# Altium PCB 12.4呼叫器.PcbDoc (part 3 of 5)
Units mm, origin at the board's own origin, x right, y up, seen from the top; angles counter-clockwise.
Board outline 60 x 92 mm, 2 copper layers (Top Layer, Bottom Layer); 66 components, 44 nets, 270 pads, 58 vias.
Unrouted connection lines stored in the file: 4.
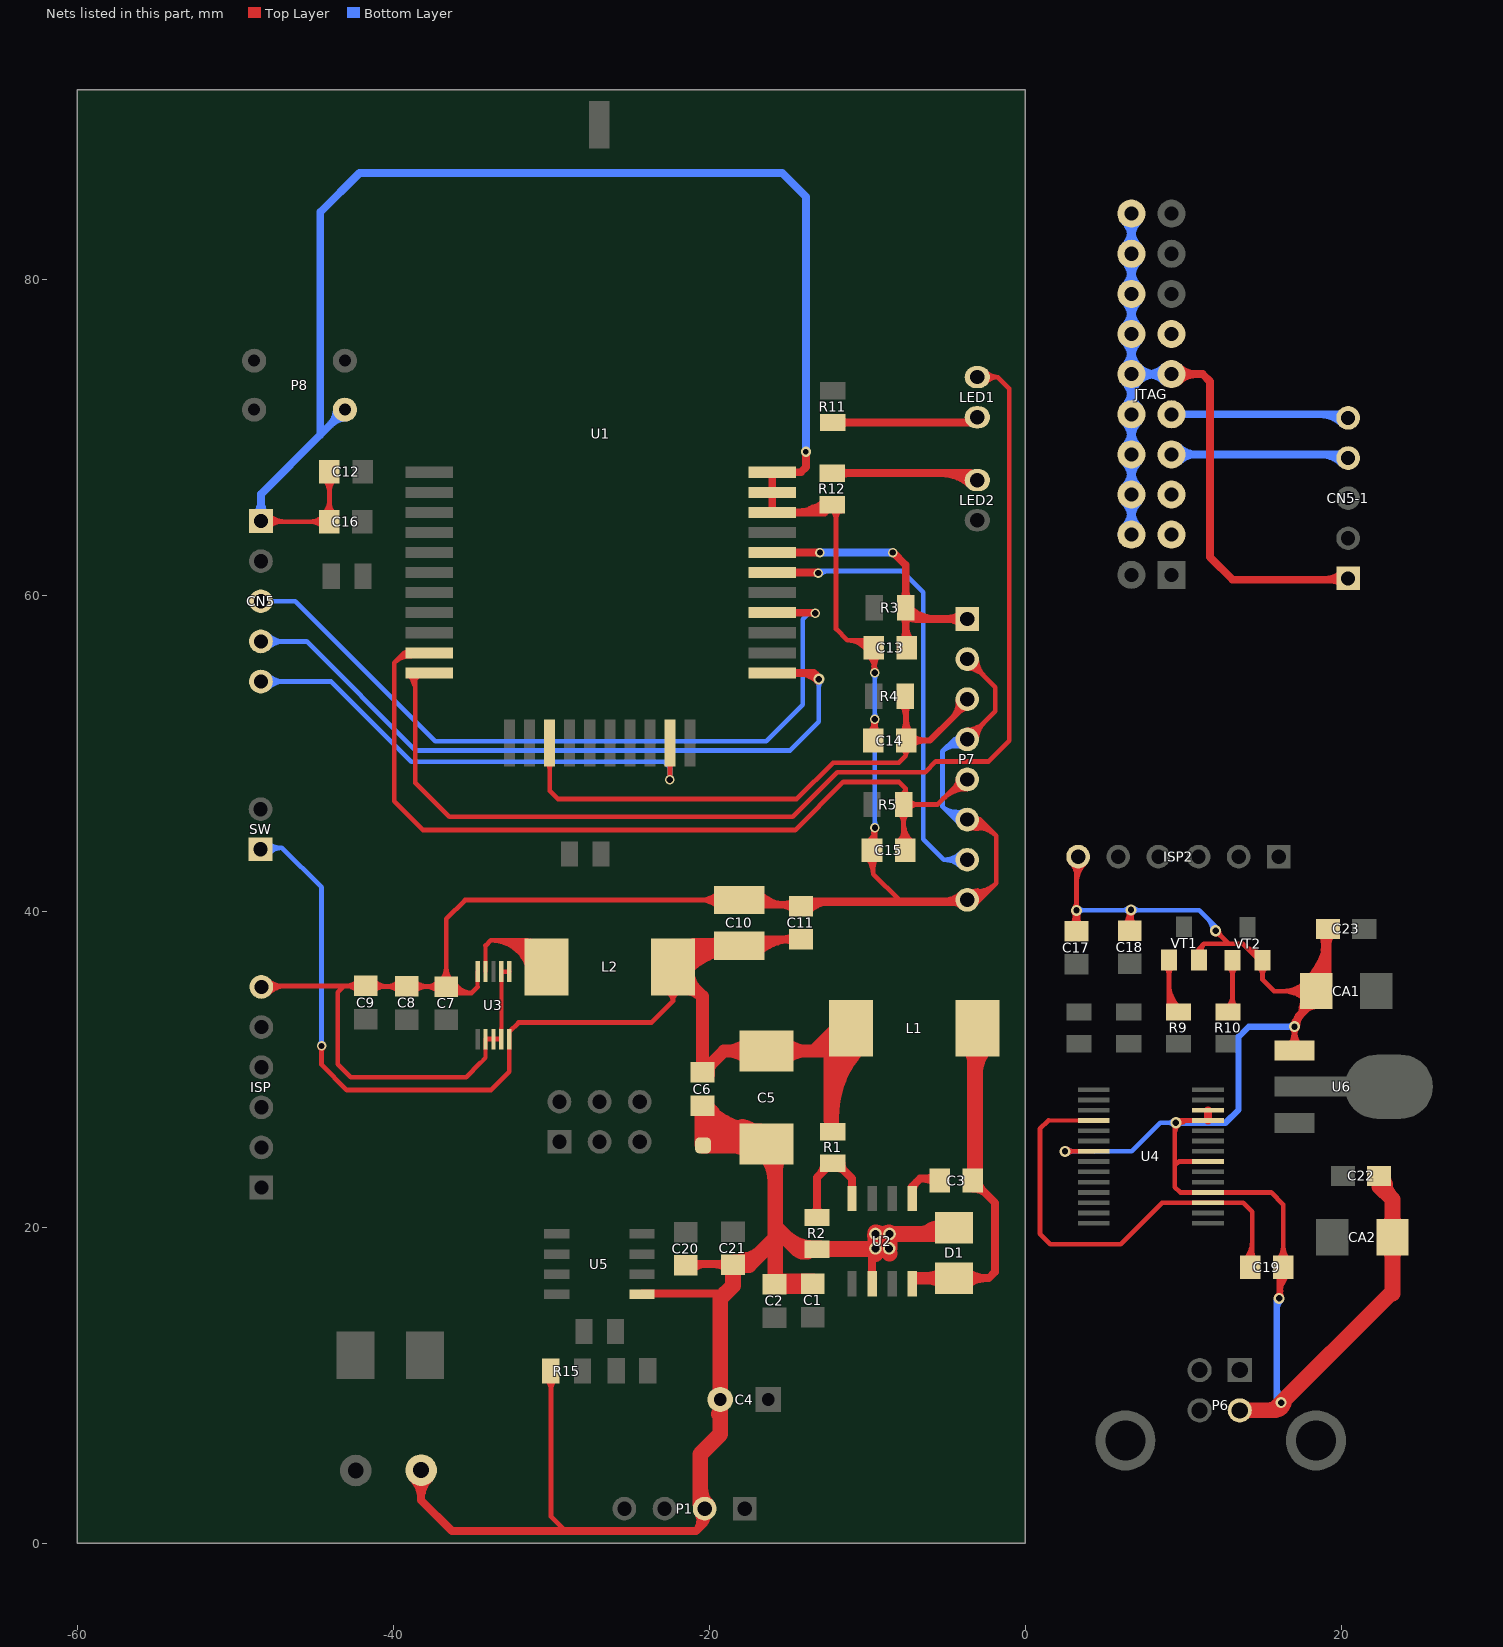
[diagram p3: the nets of this part, all layers, seen from the top]

## Via types
v1: diameter 0.6, hole 0.4, Top Layer to Bottom Layer, 39 vias
v2: diameter 0.7, hole 0.4, Top Layer to Bottom Layer, 11 vias
v3: diameter 1.27, hole 0.711, Top Layer to Bottom Layer, 3 vias
v4: diameter 0.8, hole 0.5, Top Layer to Bottom Layer, 3 vias
v5: diameter 0.65, hole 0.35, Top Layer to Bottom Layer, 1 vias
v6: diameter 0.7, hole 0.5, Top Layer to Bottom Layer, 1 vias

## Nets (pads, with @x,y where several pads share a name; then routed paths per layer and width w, separated by ;. In a path a pad name is that pad's centre, name@x,y a point inside that pad or via, vN(x,y) a via of type N, cw(c..) or ccw(c..) an arc to the next point about the centre after c; other vN are vias at no path point) (continued)
GND: (continued)
  Bottom Layer w0.3: v1@-9.51,45.288 v1(-9.51,52.146) v1(-9.51,55.093) ; P7.4@-3.658,50.65 P7.4@-3.64,50.65 ; P7.6@-3.61,45.54 -3.64,45.57 -4.17,45.57 -5.23,46.63 ; v2(2.53,24.8) 6.741,24.8 8.549,26.608 v2(9.544,26.608) ; v2(3.25,40.056) 11.024,40.056 12.065,39.014 v2(12.065,38.76) ; v1@-9.616,52.04 cw(c-9.872,51.784) -9.51,51.784 ; v1@-9.616,52.04 cw(c-9.872,51.784) -9.51,51.784 ; v1@-9.616,52.04 cw(c-9.872,51.784) -9.51,51.784 ; v1@-9.616,52.252 ccw(c-9.872,52.508) -9.51,52.508 ; v1@-9.616,52.252 ccw(c-9.872,52.508) -9.51,52.508 ; v1@-9.616,52.252 ccw(c-9.872,52.508) -9.51,52.508 ; v1@-9.616,54.987 cw(c-9.872,54.73) -9.51,54.73 ; v1@-9.616,54.987 cw(c-9.872,54.73) -9.51,54.73 ; v1@-9.616,54.987 cw(c-9.872,54.73) -9.51,54.73 ; -9.51,51.784 cw(c-9.148,51.784) v1@-9.404,52.04 ; -9.51,51.784 cw(c-9.148,51.784) v1@-9.404,52.04 ; -9.51,51.784 cw(c-9.148,51.784) v1@-9.404,52.04 ; -9.51,52.508 ccw(c-9.148,52.508) v1@-9.404,52.252 ; -9.51,52.508 ccw(c-9.148,52.508) v1@-9.404,52.252 ; -9.51,52.508 ccw(c-9.148,52.508) v1@-9.404,52.252 ; -9.51,54.73 cw(c-9.148,54.73) v1@-9.404,54.987 ; -9.51,54.73 cw(c-9.148,54.73) v1@-9.404,54.987 ; -9.51,54.73 cw(c-9.148,54.73) v1@-9.404,54.987 ; -5.23,46.63 ccw(c-4.346,47.514) P7.6@-3.881,46.353 ; -5.23,46.63 ccw(c-4.346,47.514) P7.6@-3.881,46.353 ; -5.23,46.63 ccw(c-4.346,47.514) P7.6@-3.881,46.353 ; -5.23,46.63 -5.23,50.11 ; -5.23,50.11 cw(c-4.414,49.294) P7.4@-3.917,50.335 ; -5.23,50.11 cw(c-4.414,49.294) P7.4@-3.917,50.335 ; -5.23,50.11 cw(c-4.414,49.294) P7.4@-3.917,50.335 ; -5.23,50.11 -4.464,50.876 ; -4.93,50.41 cw(c-4.22,49.7) P7.4@-3.787,50.606 ; -4.93,50.41 cw(c-4.22,49.7) P7.4@-3.787,50.606 ; -4.93,50.41 cw(c-4.22,49.7) P7.4@-3.787,50.606 ; -4.908,46.308 ccw(c-4.162,47.055) P7.6@-3.769,46.075 ; -4.908,46.308 ccw(c-4.162,47.055) P7.6@-3.769,46.075 ; -4.908,46.308 ccw(c-4.162,47.055) P7.6@-3.769,46.075 ; -4.63,50.71 cw(c-4.026,50.106) P7.4@-3.658,50.876 ; -4.63,50.71 cw(c-4.026,50.106) P7.4@-3.658,50.876 ; -4.63,50.71 cw(c-4.026,50.106) P7.4@-3.658,50.876 ; -4.587,45.987 ccw(c-3.978,46.596) P7.6@-3.658,45.796 ; -4.587,45.987 ccw(c-3.978,46.596) P7.6@-3.658,45.796 ; -4.587,45.987 ccw(c-3.978,46.596) P7.6@-3.658,45.796 ; -4.5,46.279 cw(c-4.403,45.471) P7.6@-3.658,45.796 ; -4.5,46.279 cw(c-4.403,45.471) P7.6@-3.658,45.796 ; -4.5,46.279 cw(c-4.403,45.471) P7.6@-3.658,45.796 ; -4.464,50.876 cw(c-4.464,50.635) P7.4@-4.232,50.704 ; -4.464,50.876 ccw(c-4.464,51.118) P7.4@-4.232,51.048 ; -4.464,50.876 ccw(c-4.464,51.118) P7.4@-4.232,51.048 ; -4.464,50.876 cw(c-4.464,50.635) P7.4@-4.232,50.704 ; -4.464,50.876 ccw(c-4.464,51.118) P7.4@-4.232,51.048 ; -4.464,50.876 cw(c-4.464,50.635) P7.4@-4.232,50.704 ; -4.464,50.876 P7.4@-3.658,50.876 ; v2@2.672,24.659 cw(c3.013,24.317) 3.013,24.8 ; v2@2.672,24.659 cw(c3.013,24.317) 3.013,24.8 ; v2@2.672,24.659 cw(c3.013,24.317) 3.013,24.8 ; v2@2.672,24.941 ccw(c3.013,25.283) 3.013,24.8 ; v2@2.672,24.941 ccw(c3.013,25.283) 3.013,24.8 ; v2@2.672,24.941 ccw(c3.013,25.283) 3.013,24.8 ; v2@3.391,39.914 cw(c3.733,39.573) 3.733,40.056 ; v2@3.391,39.914 cw(c3.733,39.573) 3.733,40.056 ; v2@3.391,39.914 cw(c3.733,39.573) 3.733,40.056 ; v2@3.391,40.197 ccw(c3.733,40.539) 3.733,40.056 ; v2@3.391,40.197 ccw(c3.733,40.539) 3.733,40.056 ; v2@3.391,40.197 ccw(c3.733,40.539) 3.733,40.056 ; 6.161,40.056 ccw(c6.161,40.625) v2@6.564,40.223 ; 6.161,40.056 ccw(c6.161,40.625) v2@6.564,40.223 ; 6.161,40.056 ccw(c6.161,40.625) v2@6.564,40.223 ; 6.284,40.056 cw(c6.284,39.66) v2@6.564,39.94 ; 6.284,40.056 cw(c6.284,39.66) v2@6.564,39.94 ; 6.284,40.056 cw(c6.284,39.66) v2@6.564,39.94 ; v2@6.847,39.94 cw(c7.127,39.66) 7.127,40.056 ; v2@6.847,39.94 cw(c7.127,39.66) 7.127,40.056 ; v2@6.847,39.94 cw(c7.127,39.66) 7.127,40.056 ; v2@6.847,40.223 ccw(c7.25,40.625) 7.25,40.056 ; v2@6.847,40.223 ccw(c7.25,40.625) 7.25,40.056 ; v2@6.847,40.223 ccw(c7.25,40.625) 7.25,40.056 ; 9.062,26.608 cw(c9.062,26.125) v2@9.403,26.467 ; 9.062,26.608 ccw(c9.062,27.091) v2@9.403,26.749 ; 9.062,26.608 ccw(c9.062,27.091) v2@9.403,26.749 ; 9.062,26.608 cw(c9.062,26.125) v2@9.403,26.467 ; 9.062,26.608 ccw(c9.062,27.091) v2@9.403,26.749 ; 9.062,26.608 cw(c9.062,26.125) v2@9.403,26.467 ; 11.544,39.535 cw(c10.769,38.76) v2@11.865,38.76 ; 11.544,39.535 cw(c10.769,38.76) v2@11.865,38.76 ; 11.544,39.535 cw(c10.769,38.76) v2@11.865,38.76 ; v1@-9.606,45.394 ccw(c-9.837,45.625) -9.51,45.625 cw(c-9.837,45.625) v1@-9.606,45.394 ; -9.51,45.675 ccw(c-9.112,45.675) -9.394,45.394 cw(c-9.112,45.675) -9.51,45.675
  Bottom Layer w0.4: v2(9.544,26.608) 12.689,26.608 13.513,27.432 13.513,32.055 14.148,32.69 v2(17.056,32.69) ; 15.926,9.927 ccw(c17.242,9.927) v2@16.311,8.996 ; 15.926,14.764 cw(c16.808,14.764) v2@16.184,15.388 ; v2(16.078,15.494) 15.926,15.342 15.926,11.76 15.926,9.169 v2(16.205,8.89) ; v2@9.65,26.502 cw(c9.907,26.246) 9.907,26.608 ; v2@9.65,26.502 cw(c9.907,26.246) 9.907,26.608 ; v2@9.65,26.502 cw(c9.907,26.246) 9.907,26.608 ; v2@9.65,26.714 ccw(c9.907,26.97) 9.907,26.608 ; v2@9.65,26.714 ccw(c9.907,26.97) 9.907,26.608 ; v2@9.65,26.714 ccw(c9.907,26.97) 9.907,26.608 ; 16.694,32.69 cw(c16.694,32.328) v2@16.95,32.584 ; 16.694,32.69 ccw(c16.694,33.052) v2@16.95,32.796 ; 16.694,32.69 ccw(c16.694,33.052) v2@16.95,32.796 ; 16.694,32.69 cw(c16.694,32.328) v2@16.95,32.584 ; 16.694,32.69 ccw(c16.694,33.052) v2@16.95,32.796 ; 16.694,32.69 cw(c16.694,32.328) v2@16.95,32.584
  Bottom Layer w0.5: CN5.1@-48.362,64.694 -48.362,66.396 -44.61,70.147 ; P8.2@-43.053,71.74 -43.053,71.704 -44.61,70.147 ; v5(-13.87,69.07) -13.87,85.22 -15.37,86.72 -42.13,86.72 -44.61,84.24 -44.61,70.147 ; CN5.1@-48.715,65.047 ccw(c-49.569,65.901) -48.362,65.901 ; CN5.1@-48.715,65.047 ccw(c-49.569,65.901) -48.362,65.901 ; CN5.1@-48.715,65.047 ccw(c-49.569,65.901) -48.362,65.901 ; -48.362,65.901 ccw(c-47.154,65.901) CN5.1@-48.008,65.047 ; -48.362,65.901 ccw(c-47.154,65.901) CN5.1@-48.008,65.047 ; -48.362,65.901 ccw(c-47.154,65.901) CN5.1@-48.008,65.047 ; -43.952,70.805 ccw(c-44.887,71.74) P8.2@-43.565,71.74 ; -43.952,70.805 ccw(c-44.887,71.74) P8.2@-43.565,71.74 ; -43.952,70.805 ccw(c-44.887,71.74) P8.2@-43.565,71.74 ; -43.866,70.891 cw(c-43.053,70.078) P8.2@-43.053,71.228 ; -43.866,70.891 cw(c-43.053,70.078) P8.2@-43.053,71.228 ; -43.866,70.891 cw(c-43.053,70.078) P8.2@-43.053,71.228
GND1: CN5-1.1 JTAG.4 JTAG.6 JTAG.8 JTAG.10 JTAG.11 JTAG.12 JTAG.14 JTAG.16 JTAG.18 JTAG.20 | length 190.4
  Top Layer w0.5: JTAG.11@9.27,73.989 11.244,73.989 11.71,73.524 11.71,62.404 13.14,60.974 20.359,60.974 CN5-1.1@20.447,61.062 ; JTAG.11@9.722,73.537 cw(c10.812,72.447) 10.812,73.989 ; JTAG.11@9.722,73.537 cw(c10.812,72.447) 10.812,73.989 ; JTAG.11@9.722,73.537 cw(c10.812,72.447) 10.812,73.989 ; JTAG.11@9.722,74.441 ccw(c10.812,75.532) 10.812,73.989 ; JTAG.11@9.722,74.441 ccw(c10.812,75.532) 10.812,73.989 ; JTAG.11@9.722,74.441 ccw(c10.812,75.532) 10.812,73.989 ; 19.028,60.974 ccw(c19.028,62.481) CN5-1.1@20.093,61.415 ; 19.028,60.974 ccw(c19.028,62.481) CN5-1.1@20.093,61.415 ; 19.028,60.974 ccw(c19.028,62.481) CN5-1.1@20.093,61.415 ; 19.452,60.974 cw(c19.452,60.066) CN5-1.1@20.093,60.708 ; 19.452,60.974 cw(c19.452,60.066) CN5-1.1@20.093,60.708 ; 19.452,60.974 cw(c19.452,60.066) CN5-1.1@20.093,60.708
  Bottom Layer w0.5: JTAG.4@6.105,63.829 JTAG.4@6.73,63.829 JTAG.6@6.73,66.369 JTAG.8@6.73,68.909 JTAG.10@6.73,71.449 JTAG.12@6.73,73.989 ; JTAG.20@6.73,84.149 JTAG.18@6.73,81.609 JTAG.16@6.73,79.069 JTAG.14@6.73,76.529 JTAG.12@6.73,73.989 ; JTAG.11@9.27,73.989 JTAG.12@6.73,73.989 ; JTAG.4@6.278,64.281 ccw(c5.187,65.372) 6.73,65.372 ; JTAG.4@6.278,64.281 ccw(c5.187,65.372) 6.73,65.372 ; JTAG.4@6.278,64.281 ccw(c5.187,65.372) 6.73,65.372 ; JTAG.6@6.278,65.917 cw(c5.187,64.827) 6.73,64.827 ; JTAG.6@6.278,65.917 cw(c5.187,64.827) 6.73,64.827 ; JTAG.6@6.278,65.917 cw(c5.187,64.827) 6.73,64.827 ; JTAG.6@6.278,66.821 ccw(c5.187,67.912) 6.73,67.912 ; JTAG.6@6.278,66.821 ccw(c5.187,67.912) 6.73,67.912 ; JTAG.6@6.278,66.821 ccw(c5.187,67.912) 6.73,67.912 ; JTAG.8@6.278,68.457 cw(c5.187,67.367) 6.73,67.367 ; JTAG.8@6.278,68.457 cw(c5.187,67.367) 6.73,67.367 ; JTAG.8@6.278,68.457 cw(c5.187,67.367) 6.73,67.367 ; JTAG.8@6.278,69.361 ccw(c5.187,70.452) 6.73,70.452 ; JTAG.8@6.278,69.361 ccw(c5.187,70.452) 6.73,70.452 ; JTAG.8@6.278,69.361 ccw(c5.187,70.452) 6.73,70.452 ; JTAG.10@6.278,70.997 cw(c5.187,69.907) 6.73,69.907 ; JTAG.10@6.278,70.997 cw(c5.187,69.907) 6.73,69.907 ; JTAG.10@6.278,70.997 cw(c5.187,69.907) 6.73,69.907 ; JTAG.10@6.278,71.901 ccw(c5.187,72.992) 6.73,72.992 ; JTAG.10@6.278,71.901 ccw(c5.187,72.992) 6.73,72.992 ; JTAG.10@6.278,71.901 ccw(c5.187,72.992) 6.73,72.992 ; JTAG.12@6.278,73.537 cw(c5.187,72.447) 6.73,72.447 ; JTAG.12@6.278,73.537 cw(c5.187,72.447) 6.73,72.447 ; JTAG.12@6.278,73.537 cw(c5.187,72.447) 6.73,72.447 ; JTAG.12@6.278,74.441 ccw(c5.187,75.532) 6.73,75.532 ; JTAG.12@6.278,74.441 ccw(c5.187,75.532) 6.73,75.532 ; JTAG.12@6.278,74.441 ccw(c5.187,75.532) 6.73,75.532 ; JTAG.14@6.278,76.077 cw(c5.187,74.987) 6.73,74.987 ; JTAG.14@6.278,76.077 cw(c5.187,74.987) 6.73,74.987 ; JTAG.14@6.278,76.077 cw(c5.187,74.987) 6.73,74.987 ; JTAG.14@6.278,76.981 ccw(c5.187,78.072) 6.73,78.072 ; JTAG.14@6.278,76.981 ccw(c5.187,78.072) 6.73,78.072 ; JTAG.14@6.278,76.981 ccw(c5.187,78.072) 6.73,78.072 ; JTAG.16@6.278,78.617 cw(c5.187,77.527) 6.73,77.527 ; JTAG.16@6.278,78.617 cw(c5.187,77.527) 6.73,77.527 ; JTAG.16@6.278,78.617 cw(c5.187,77.527) 6.73,77.527 ; JTAG.16@6.278,79.521 ccw(c5.187,80.612) 6.73,80.612 ; JTAG.16@6.278,79.521 ccw(c5.187,80.612) 6.73,80.612 ; JTAG.16@6.278,79.521 ccw(c5.187,80.612) 6.73,80.612 ; JTAG.18@6.278,81.157 cw(c5.187,80.067) 6.73,80.067 ; JTAG.18@6.278,81.157 cw(c5.187,80.067) 6.73,80.067 ; JTAG.18@6.278,81.157 cw(c5.187,80.067) 6.73,80.067 ; JTAG.18@6.278,82.061 ccw(c5.187,83.152) 6.73,83.152 ; JTAG.18@6.278,82.061 ccw(c5.187,83.152) 6.73,83.152 ; JTAG.18@6.278,82.061 ccw(c5.187,83.152) 6.73,83.152 ; JTAG.20@6.278,83.697 cw(c5.187,82.607) 6.73,82.607 ; JTAG.20@6.278,83.697 cw(c5.187,82.607) 6.73,82.607 ; JTAG.20@6.278,83.697 cw(c5.187,82.607) 6.73,82.607 ; 6.73,64.827 cw(c8.272,64.827) JTAG.6@7.182,65.917 ; 6.73,64.827 cw(c8.272,64.827) JTAG.6@7.182,65.917 ; 6.73,64.827 cw(c8.272,64.827) JTAG.6@7.182,65.917 ; 6.73,65.372 ccw(c8.272,65.372) JTAG.4@7.182,64.281 ; 6.73,65.372 ccw(c8.272,65.372) JTAG.4@7.182,64.281 ; 6.73,65.372 ccw(c8.272,65.372) JTAG.4@7.182,64.281 ; 6.73,67.367 cw(c8.272,67.367) JTAG.8@7.182,68.457 ; 6.73,67.367 cw(c8.272,67.367) JTAG.8@7.182,68.457 ; 6.73,67.367 cw(c8.272,67.367) JTAG.8@7.182,68.457 ; 6.73,67.912 ccw(c8.272,67.912) JTAG.6@7.182,66.821 ; 6.73,67.912 ccw(c8.272,67.912) JTAG.6@7.182,66.821 ; 6.73,67.912 ccw(c8.272,67.912) JTAG.6@7.182,66.821 ; 6.73,69.907 cw(c8.272,69.907) JTAG.10@7.182,70.997 ; 6.73,69.907 cw(c8.272,69.907) JTAG.10@7.182,70.997 ; 6.73,69.907 cw(c8.272,69.907) JTAG.10@7.182,70.997 ; 6.73,70.452 ccw(c8.272,70.452) JTAG.8@7.182,69.361 ; 6.73,70.452 ccw(c8.272,70.452) JTAG.8@7.182,69.361 ; 6.73,70.452 ccw(c8.272,70.452) JTAG.8@7.182,69.361 ; 6.73,72.447 cw(c8.272,72.447) JTAG.12@7.182,73.537 ; 6.73,72.447 cw(c8.272,72.447) JTAG.12@7.182,73.537 ; 6.73,72.447 cw(c8.272,72.447) JTAG.12@7.182,73.537 ; 6.73,72.992 ccw(c8.272,72.992) JTAG.10@7.182,71.901 ; 6.73,72.992 ccw(c8.272,72.992) JTAG.10@7.182,71.901 ; 6.73,72.992 ccw(c8.272,72.992) JTAG.10@7.182,71.901 ; 6.73,74.987 cw(c8.272,74.987) JTAG.14@7.182,76.077 ; 6.73,74.987 cw(c8.272,74.987) JTAG.14@7.182,76.077 ; 6.73,74.987 cw(c8.272,74.987) JTAG.14@7.182,76.077 ; 6.73,75.532 ccw(c8.272,75.532) JTAG.12@7.182,74.441 ; 6.73,75.532 ccw(c8.272,75.532) JTAG.12@7.182,74.441 ; 6.73,75.532 ccw(c8.272,75.532) JTAG.12@7.182,74.441 ; 6.73,77.527 cw(c8.272,77.527) JTAG.16@7.182,78.617 ; 6.73,77.527 cw(c8.272,77.527) JTAG.16@7.182,78.617 ; 6.73,77.527 cw(c8.272,77.527) JTAG.16@7.182,78.617 ; 6.73,78.072 ccw(c8.272,78.072) JTAG.14@7.182,76.981 ; 6.73,78.072 ccw(c8.272,78.072) JTAG.14@7.182,76.981 ; 6.73,78.072 ccw(c8.272,78.072) JTAG.14@7.182,76.981 ; 6.73,80.067 cw(c8.272,80.067) JTAG.18@7.182,81.157 ; 6.73,80.067 cw(c8.272,80.067) JTAG.18@7.182,81.157 ; 6.73,80.067 cw(c8.272,80.067) JTAG.18@7.182,81.157 ; 6.73,80.612 ccw(c8.272,80.612) JTAG.16@7.182,79.521 ; 6.73,80.612 ccw(c8.272,80.612) JTAG.16@7.182,79.521 ; 6.73,80.612 ccw(c8.272,80.612) JTAG.16@7.182,79.521 ; 6.73,82.607 cw(c8.272,82.607) JTAG.20@7.182,83.697 ; 6.73,82.607 cw(c8.272,82.607) JTAG.20@7.182,83.697 ; 6.73,82.607 cw(c8.272,82.607) JTAG.20@7.182,83.697 ; 6.73,83.152 ccw(c8.272,83.152) JTAG.18@7.182,82.061 ; 6.73,83.152 ccw(c8.272,83.152) JTAG.18@7.182,82.061 ; 6.73,83.152 ccw(c8.272,83.152) JTAG.18@7.182,82.061 ; JTAG.12@7.182,73.537 cw(c8.272,72.447) 8.272,73.989 ; JTAG.12@7.182,73.537 cw(c8.272,72.447) 8.272,73.989 ; JTAG.12@7.182,73.537 cw(c8.272,72.447) 8.272,73.989 ; JTAG.12@7.182,74.441 ccw(c8.272,75.532) 8.272,73.989 ; JTAG.12@7.182,74.441 ccw(c8.272,75.532) 8.272,73.989 ; JTAG.12@7.182,74.441 ccw(c8.272,75.532) 8.272,73.989 ; 7.727,73.989 cw(c7.727,72.447) JTAG.11@8.818,73.537 ; 7.727,73.989 ccw(c7.727,75.532) JTAG.11@8.818,74.441 ; 7.727,73.989 ccw(c7.727,75.532) JTAG.11@8.818,74.441 ; 7.727,73.989 cw(c7.727,72.447) JTAG.11@8.818,73.537 ; 7.727,73.989 ccw(c7.727,75.532) JTAG.11@8.818,74.441 ; 7.727,73.989 cw(c7.727,72.447) JTAG.11@8.818,73.537
JNTRST: JTAG.3
JTCK: CN5-1.5 CN5.5 JTAG.9 U1.20 | length 59.7
  Top Layer w0.3: v1(-22.479,48.311) -22.472,48.318 U1.20@-22.472,50.643 ; U1.20@-22.613,49.352 cw(c-22.955,49.01) -22.472,49.01 ; U1.20@-22.613,49.352 cw(c-22.955,49.01) -22.472,49.01 ; U1.20@-22.613,49.352 cw(c-22.955,49.01) -22.472,49.01 ; v1@-22.585,48.417 ccw(c-22.858,48.69) -22.472,48.69 ; v1@-22.585,48.417 ccw(c-22.858,48.69) -22.472,48.69 ; v1@-22.585,48.417 ccw(c-22.858,48.69) -22.472,48.69 ; -22.472,48.656 ccw(c-22.134,48.656) v1@-22.373,48.417 ; -22.472,48.656 ccw(c-22.134,48.656) v1@-22.373,48.417 ; -22.472,48.656 ccw(c-22.134,48.656) v1@-22.373,48.417 ; -22.472,49.01 cw(c-21.989,49.01) U1.20@-22.331,49.352 ; -22.472,49.01 cw(c-21.989,49.01) U1.20@-22.331,49.352 ; -22.472,49.01 cw(c-21.989,49.01) U1.20@-22.331,49.352
  Bottom Layer w0.3: CN5.5@-48.362,54.534 -43.917,54.534 -38.837,49.454 -22.835,49.454 -22.479,49.098 v1(-22.479,48.311) ; CN5.5@-47.937,54.11 cw(c-46.913,53.085) -46.913,54.534 ; CN5.5@-47.937,54.11 cw(c-46.913,53.085) -46.913,54.534 ; CN5.5@-47.937,54.11 cw(c-46.913,53.085) -46.913,54.534 ; CN5.5@-47.937,54.958 ccw(c-46.913,55.982) -46.913,54.534 ; CN5.5@-47.937,54.958 ccw(c-46.913,55.982) -46.913,54.534 ; CN5.5@-47.937,54.958 ccw(c-46.913,55.982) -46.913,54.534 ; v1@-22.585,48.417 ccw(c-22.841,48.673) -22.479,48.673 ; v1@-22.585,48.417 ccw(c-22.841,48.673) -22.479,48.673 ; v1@-22.585,48.417 ccw(c-22.841,48.673) -22.479,48.673 ; -22.479,48.673 ccw(c-22.117,48.673) v1@-22.373,48.417 ; -22.479,48.673 ccw(c-22.117,48.673) v1@-22.373,48.417 ; -22.479,48.673 ccw(c-22.117,48.673) v1@-22.373,48.417
  Bottom Layer w0.5: JTAG.9@9.27,71.449 20.219,71.449 CN5-1.5@20.447,71.222 ; 18.69,71.449 cw(c18.69,69.465) CN5-1.5@20.093,70.868 ; 18.69,71.449 cw(c18.69,69.465) CN5-1.5@20.093,70.868 ; 18.69,71.449 cw(c18.69,69.465) CN5-1.5@20.093,70.868
JTDI: JTAG.5
JTDO: JTAG.13
JTMS: CN5-1.4 CN5.4 JTAG.7 U1.22 | length 81.8
  Top Layer w0.5: U1.22@-16.003,55.08 -13.373,55.08 -13.056,54.763 v2(-13.056,54.682) ; -14.259,55.08 cw(c-14.259,53.479) v2@-13.127,54.611 ; -14.259,55.08 cw(c-14.259,53.479) v2@-13.127,54.611 ; -14.259,55.08 cw(c-14.259,53.479) v2@-13.127,54.611 ; -13.284,54.99 cw(c-13.592,54.682) v2@-13.156,54.682 ; -13.284,54.99 cw(c-13.592,54.682) v2@-13.156,54.682 ; -13.284,54.99 cw(c-13.592,54.682) v2@-13.156,54.682
  Bottom Layer w0.3: CN5.4@-48.362,57.074 -45.466,57.074 -38.557,50.165 -14.884,50.165 -13.056,51.994 v2@-13.056,54.635 ; CN5.4@-47.937,56.65 cw(c-46.913,55.625) -46.913,57.074 ; CN5.4@-47.937,56.65 cw(c-46.913,55.625) -46.913,57.074 ; CN5.4@-47.937,56.65 cw(c-46.913,55.625) -46.913,57.074 ; CN5.4@-47.937,57.498 ccw(c-46.913,58.522) -46.913,57.074 ; CN5.4@-47.937,57.498 ccw(c-46.913,58.522) -46.913,57.074 ; CN5.4@-47.937,57.498 ccw(c-46.913,58.522) -46.913,57.074 ; v2@-13.197,54.54 cw(c-13.539,54.198) -13.056,54.198 ; v2@-13.197,54.54 cw(c-13.539,54.198) -13.056,54.198 ; v2@-13.197,54.54 cw(c-13.539,54.198) -13.056,54.198 ; -13.056,54.199 cw(c-12.573,54.199) v2@-12.914,54.54 ; -13.056,54.199 cw(c-12.573,54.199) v2@-12.914,54.54 ; -13.056,54.199 cw(c-12.573,54.199) v2@-12.914,54.54
  Bottom Layer w0.5: JTAG.7@9.27,68.909 20.219,68.909 CN5-1.4@20.447,68.682 ; JTAG.7@9.722,68.457 cw(c10.812,67.367) 10.812,68.909 ; JTAG.7@9.722,68.457 cw(c10.812,67.367) 10.812,68.909 ; JTAG.7@9.722,68.457 cw(c10.812,67.367) 10.812,68.909 ; JTAG.7@9.722,69.361 ccw(c10.812,70.452) 10.812,68.909 ; JTAG.7@9.722,69.361 ccw(c10.812,70.452) 10.812,68.909 ; JTAG.7@9.722,69.361 ccw(c10.812,70.452) 10.812,68.909 ; 18.69,68.909 cw(c18.69,66.925) CN5-1.4@20.093,68.328 ; 18.69,68.909 cw(c18.69,66.925) CN5-1.4@20.093,68.328 ; 18.69,68.909 cw(c18.69,66.925) CN5-1.4@20.093,68.328
KEY1: C13.2 P7.1 R3.1 U1.28 | length 45.4
  Top Layer w0.5: U1.28@-16.003,62.7 v1(-12.98,62.7) ; v1(-8.37,62.7) -8.35,62.7 -7.55,61.9 R3.1@-7.55,59.21 ; C13.2@-7.486,56.678 -7.55,56.742 R3.1@-7.55,59.21 ; P7.1@-3.658,58.27 P7.1@-3.64,58.27 ; P7.1@-3.658,58.496 -6.836,58.496 ; C13.2@-7.769,57.061 ccw(c-8.298,57.59) -7.55,57.59 ; C13.2@-7.769,57.061 ccw(c-8.298,57.59) -7.55,57.59 ; C13.2@-7.769,57.061 ccw(c-8.298,57.59) -7.55,57.59 ; R3.1@-7.762,58.748 cw(c-8.274,58.236) -7.55,58.236 ; R3.1@-7.762,58.748 cw(c-8.274,58.236) -7.55,58.236 ; R3.1@-7.762,58.748 cw(c-8.274,58.236) -7.55,58.236 ; R3.1@-7.762,59.672 ccw(c-8.274,60.184) -7.55,60.184 ; R3.1@-7.762,59.672 ccw(c-8.274,60.184) -7.55,60.184 ; R3.1@-7.762,59.672 ccw(c-8.274,60.184) -7.55,60.184 ; R3.1@-7.691,58.819 ccw(c-6.913,59.597) -6.913,58.496 ; R3.1@-7.691,58.819 ccw(c-6.913,59.597) -6.913,58.496 ; R3.1@-7.691,58.819 ccw(c-6.913,59.597) -6.913,58.496 ; -7.55,57.898 ccw(c-6.366,57.898) C13.2@-7.203,57.061 ; -7.55,57.898 ccw(c-6.366,57.898) C13.2@-7.203,57.061 ; -7.55,57.898 ccw(c-6.366,57.898) C13.2@-7.203,57.061 ; -7.55,58.236 cw(c-6.826,58.236) R3.1@-7.338,58.748 ; -7.55,58.236 cw(c-6.826,58.236) R3.1@-7.338,58.748 ; -7.55,58.236 cw(c-6.826,58.236) R3.1@-7.338,58.748 ; R3.1@-7.55,59.21 -6.836,58.496 ; -7.55,60.184 ccw(c-6.826,60.184) R3.1@-7.338,59.672 ; -7.55,60.184 ccw(c-6.826,60.184) R3.1@-7.338,59.672 ; -7.55,60.184 ccw(c-6.826,60.184) R3.1@-7.338,59.672 ; R3.1@-7.474,58.67 cw(c-7.307,58.026) -6.836,58.496 ; R3.1@-7.474,58.67 cw(c-7.307,58.026) -6.836,58.496 ; R3.1@-7.474,58.67 cw(c-7.307,58.026) -6.836,58.496 ; R3.1@-7.338,59.172 ccw(c-5.706,60.804) -5.706,58.496 ; R3.1@-7.338,59.172 ccw(c-5.706,60.804) -5.706,58.496 ; R3.1@-7.338,59.172 ccw(c-5.706,60.804) -5.706,58.496 ; -4.865,58.496 cw(c-4.865,57.289) P7.1@-4.011,58.143 ; -4.865,58.496 ccw(c-4.865,59.703) P7.1@-4.011,58.85 ; -4.865,58.496 ccw(c-4.865,59.703) P7.1@-4.011,58.85 ; -4.865,58.496 cw(c-4.865,57.289) P7.1@-4.011,58.143 ; -4.865,58.496 ccw(c-4.865,59.703) P7.1@-4.011,58.85 ; -4.865,58.496 cw(c-4.865,57.289) P7.1@-4.011,58.143
  Bottom Layer w0.5: v1(-12.98,62.7) v1(-8.37,62.7)
KEY2: C14.2 P7.3 R4.1 U1.14 | length 60.2
  Top Layer w0.3: U1.14@-30.092,50.643 -30.092,47.612 -29.58,47.1 -14.45,47.1 -12.15,49.4 -7.98,49.4 -7.55,49.83 ; C14.2@-7.55,50.6 -7.55,49.83 ; U1.14@-30.233,49.352 cw(c-30.575,49.01) -30.092,49.01 ; U1.14@-30.233,49.352 cw(c-30.575,49.01) -30.092,49.01 ; U1.14@-30.233,49.352 cw(c-30.575,49.01) -30.092,49.01 ; -30.092,49.01 cw(c-29.609,49.01) U1.14@-29.951,49.352 ; -30.092,49.01 cw(c-29.609,49.01) U1.14@-29.951,49.352 ; -30.092,49.01 cw(c-29.609,49.01) U1.14@-29.951,49.352 ; C14.2@-7.792,50.287 cw(c-8.104,49.829) -7.55,49.829 ; C14.2@-7.792,50.287 cw(c-8.104,49.829) -7.55,49.829 ; C14.2@-7.792,50.287 cw(c-8.104,49.829) -7.55,49.829 ; -7.55,49.829 cw(c-7.078,49.829) C14.2@-7.288,50.252 ; -7.55,49.829 cw(c-7.078,49.829) C14.2@-7.288,50.252 ; -7.55,49.829 cw(c-7.078,49.829) C14.2@-7.288,50.252
  Top Layer w0.4: C14.2@-7.55,50.6 -7.536,50.614 R4.1@-7.536,53.253 ; C14.2@-7.51,50.8 -6.03,50.8 -4.579,52.251 ; P7.3@-3.64,53.19 -4.579,52.251 ; R4.1@-7.834,53.111 cw(c-8.554,52.391) -7.536,52.391 ; R4.1@-7.834,53.111 cw(c-8.554,52.391) -7.536,52.391 ; R4.1@-7.834,53.111 cw(c-8.554,52.391) -7.536,52.391 ; C14.2@-7.828,51.218 ccw(c-8.534,51.924) -7.536,51.924 ; C14.2@-7.828,51.218 ccw(c-8.534,51.924) -7.536,51.924 ; C14.2@-7.828,51.218 ccw(c-8.534,51.924) -7.536,51.924 ; -7.536,52.049 ccw(c-6.361,52.049) C14.2@-7.192,51.218 ; -7.536,52.049 ccw(c-6.361,52.049) C14.2@-7.192,51.218 ; -7.536,52.049 ccw(c-6.361,52.049) C14.2@-7.192,51.218 ; -7.536,52.636 cw(c-6.864,52.636) R4.1@-7.339,53.111 ; -7.536,52.636 cw(c-6.864,52.636) R4.1@-7.339,53.111 ; -7.536,52.636 cw(c-6.864,52.636) R4.1@-7.339,53.111 ; C14.2@-7.192,50.482 cw(c-6.424,49.714) -6.424,50.8 ; C14.2@-7.192,50.482 cw(c-6.424,49.714) -6.424,50.8 ; C14.2@-7.192,50.482 cw(c-6.424,49.714) -6.424,50.8 ; C14.2@-7.192,51.118 ccw(c-6.424,51.886) -6.424,50.8 ; C14.2@-7.192,51.118 ccw(c-6.424,51.886) -6.424,50.8 ; C14.2@-7.192,51.118 ccw(c-6.424,51.886) -6.424,50.8 ; -4.579,52.251 ccw(c-5.51,53.183) P7.3@-4.203,53.347 ; -4.579,52.251 ccw(c-5.51,53.183) P7.3@-4.203,53.347 ; -4.579,52.251 ccw(c-5.51,53.183) P7.3@-4.203,53.347 ; -4.18,52.65 cw(c-3.658,52.127) P7.3@-3.658,52.866 ; -4.18,52.65 cw(c-3.658,52.127) P7.3@-3.658,52.866 ; -4.18,52.65 cw(c-3.658,52.127) P7.3@-3.658,52.866
KEY3: C15.2 P7.5 R5.1 U1.10 | length 90.6
  Top Layer w0.3: U1.10@-37.704,56.35 -39.3,56.35 ; C15.2@-7.941,44.483 ccw(c-8.553,45.094) -7.688,45.094 ; -7.688,44.854 ccw(c-6.863,44.854) C15.2@-7.446,44.271 ; -7.688,45.579 ccw(c-6.138,45.579) C15.2@-7.234,44.483 ; C15.2@-7.588,43.851 -7.688,43.952 R5.1@-7.688,46.75 ; P7.5@-4.189,48.11 -5.548,46.75 R5.1@-7.688,46.75 ; -39.93,55.72 cw(c-38.891,54.681) U1.10@-38.858,56.15 ; -39.93,55.72 cw(c-38.891,54.681) U1.10@-38.858,56.15 ; -39.93,55.72 cw(c-38.891,54.681) U1.10@-38.858,56.15 ; -39.93,55.72 -39.93,46.966 -38.1,45.136 -14.544,45.136 -11.5,48.18 -7.98,48.18 -7.57,47.77 ; -39.93,55.72 -39.3,56.35 ; -39.433,56.217 cw(c-38.869,55.653) U1.10@-38.852,56.45 ; -39.433,56.217 cw(c-38.869,55.653) U1.10@-38.852,56.45 ; -39.433,56.217 cw(c-38.869,55.653) U1.10@-38.852,56.45 ; -39.3,56.35 cw(c-39.3,55.953) U1.10@-39.003,56.217 ; -39.3,56.35 ccw(c-39.3,56.747) U1.10@-39.003,56.483 ; -39.3,56.35 ccw(c-39.3,56.747) U1.10@-39.003,56.483 ; -39.3,56.35 cw(c-39.3,55.953) U1.10@-39.003,56.217 ; -39.3,56.35 ccw(c-39.3,56.747) U1.10@-39.003,56.483 ; -39.3,56.35 cw(c-39.3,55.953) U1.10@-39.003,56.217 ; -7.688,45.535 cw(c-6.723,45.535) -7.405,46.218 ccw(c-6.723,45.535) -7.688,45.535 ; -7.688,45.535 ccw(c-8.654,45.535) -7.971,46.218 cw(c-8.654,45.535) -7.688,45.535 ; R5.1@-7.688,46.75 -7.57,46.869 -7.57,47.77 ; -7.57,47.77 cw(c-8.001,47.77) -7.839,47.371 ccw(c-8.001,47.77) -7.57,47.77 ; -6.723,46.75 cw(c-6.723,47.716) -7.405,47.033 ccw(c-6.723,47.716) -6.723,46.75 ; -6.723,46.75 ccw(c-6.723,45.785) -7.405,46.468 cw(c-6.723,45.785) -6.723,46.75 ; -5.202,47.096 cw(c-3.658,45.552) P7.5@-3.658,47.736 ; -5.202,47.096 cw(c-3.658,45.552) P7.5@-3.658,47.736 ; -5.202,47.096 cw(c-3.658,45.552) P7.5@-3.658,47.736 ; -4.69,47.609 cw(c-3.658,46.576) P7.5@-3.658,48.036 ; -4.69,47.609 cw(c-3.658,46.576) P7.5@-3.658,48.036 ; -4.69,47.609 cw(c-3.658,46.576) P7.5@-3.658,48.036 ; -4.466,47.832 ccw(c-4.97,48.336) P7.5@-4.258,48.336 ; -4.466,47.832 ccw(c-4.97,48.336) P7.5@-4.258,48.336 ; -4.466,47.832 ccw(c-4.97,48.336) P7.5@-4.258,48.336 ; -4.438,47.827 ccw(c-4.608,48.464) P7.5@-3.955,48.376 ; -4.438,47.827 ccw(c-4.608,48.464) P7.5@-3.955,48.376 ; -4.438,47.827 ccw(c-4.608,48.464) P7.5@-3.955,48.376 ; -4.306,47.862 cw(c-4.187,47.419) P7.5@-3.958,47.817 ; -4.306,47.862 cw(c-4.187,47.419) P7.5@-3.958,47.817 ; -4.306,47.862 cw(c-4.187,47.419) P7.5@-3.958,47.817 ; C15.2@-7.941,44.305 ccw(c-8.553,44.916) -7.688,44.916 cw(c-8.553,44.916) C15.2@-7.941,44.305 ; -7.688,44.677 ccw(c-6.863,44.677) -7.446,44.093 cw(c-6.863,44.677) -7.688,44.677 ; -7.688,45.401 ccw(c-6.138,45.401) -7.234,44.305 cw(c-6.138,45.401) -7.688,45.401 ; -7.57,47.681 ccw(c-7.008,47.681) -7.405,47.283 cw(c-7.008,47.681) -7.57,47.681
KEY4: P7.7 U1.27 | length 37.8
  Top Layer w0.3: v1@-13.11,61.43 v1(-13.08,61.4)
  Top Layer w0.5: U1.27@-16.003,61.43 v1@-13.11,61.43
  Bottom Layer w0.3: v1(-13.08,61.4) -12.957,61.523 -7.783,61.523 -6.44,60.18 -6.44,44.56 -5.136,43.256 P7.7@-3.658,43.256 ; v1@-12.974,61.294 cw(c-12.421,60.741) -12.421,61.523 ; v1@-12.974,61.294 cw(c-12.421,60.741) -12.421,61.523 ; v1@-12.974,61.294 cw(c-12.421,60.741) -12.421,61.523 ; -5.106,43.256 cw(c-5.106,41.808) P7.7@-4.082,42.832 ; -5.106,43.256 ccw(c-5.106,44.705) P7.7@-4.082,43.68 ; -5.106,43.256 ccw(c-5.106,44.705) P7.7@-4.082,43.68 ; -5.106,43.256 cw(c-5.106,41.808) P7.7@-4.082,42.832 ; -5.106,43.256 ccw(c-5.106,44.705) P7.7@-4.082,43.68 ; -5.106,43.256 cw(c-5.106,41.808) P7.7@-4.082,42.832
NetC3_1: C3.1 U2.1 | length 9.1
  Top Layer w0.5: U2.1@-7.144,21.81 -7.144,22.576 -6.65,23.07 -5.53,23.07 C3.1@-5.41,22.95 ; U2.1@-7.094,22.31 cw(c-6.33,22.31) -6.87,22.85 ; U2.1@-7.094,22.31 cw(c-6.33,22.31) -6.87,22.85 ; U2.1@-7.094,22.31 cw(c-6.33,22.31) -6.87,22.85 ; -6.424,23.07 cw(c-6.424,22.036) C3.1@-5.693,22.767 ; -6.424,23.07 cw(c-6.424,22.036) C3.1@-5.693,22.767 ; -6.424,23.07 cw(c-6.424,22.036) C3.1@-5.693,22.767 ; -6.327,23.07 ccw(c-6.327,23.967) C3.1@-5.693,23.333 ; -6.327,23.07 ccw(c-6.327,23.967) C3.1@-5.693,23.333 ; -6.327,23.07 ccw(c-6.327,23.967) C3.1@-5.693,23.333
NetC3_2: C3.2 D1.2 L1.1 U2.8 | length 54
  Top Layer w0.5: D1.2@-4.486,16.772 -2.298,16.772 -1.9,17.17 -1.9,21.54 C3.2@-3.31,22.95 C3.2@-3.39,23.03 ; D1.2@-3.756,16.242 cw(c-2.475,14.961) -2.475,16.772 ; D1.2@-3.756,16.242 cw(c-2.475,14.961) -2.475,16.772 ; D1.2@-3.756,16.242 cw(c-2.475,14.961) -2.475,16.772 ; D1.2@-3.756,17.302 ccw(c-2.475,18.583) -2.475,16.772 ; D1.2@-3.756,17.302 ccw(c-2.475,18.583) -2.475,16.772 ; D1.2@-3.756,17.302 ccw(c-2.475,18.583) -2.475,16.772 ; C3.2@-3.31,22.45 cw(c-3.31,21.243) -2.456,22.096 ; C3.2@-3.31,22.45 cw(c-3.31,21.243) -2.456,22.096 ; C3.2@-3.31,22.45 cw(c-3.31,21.243) -2.456,22.096 ; C3.2@-2.91,22.85 ccw(c-2.186,22.85) C3.2@-2.698,22.338 ; C3.2@-2.91,22.85 ccw(c-2.186,22.85) C3.2@-2.698,22.338 ; C3.2@-2.91,22.85 ccw(c-2.186,22.85) C3.2@-2.698,22.338
  Top Layer w0.8: U2.8@-6.99,16.772 D1.2@-4.486,16.772 ; -6.135,16.772 cw(c-6.135,15.323) D1.2@-5.11,16.348 ; -6.135,16.772 ccw(c-6.135,18.221) D1.2@-5.11,17.196 ; -6.135,16.772 ccw(c-6.135,18.221) D1.2@-5.11,17.196 ; -6.135,16.772 cw(c-6.135,15.323) D1.2@-5.11,16.348 ; -6.135,16.772 ccw(c-6.135,18.221) D1.2@-5.11,17.196 ; -6.135,16.772 cw(c-6.135,15.323) D1.2@-5.11,16.348
  Top Layer w1: C3.2@-3.17,23.25 L1.1@-3.17,33.36 ; L1.1@-3.647,31.552 cw(c-4.798,30.401) -3.17,30.401 ; L1.1@-3.647,31.552 cw(c-4.798,30.401) -3.17,30.401 ; L1.1@-3.647,31.552 cw(c-4.798,30.401) -3.17,30.401 ; C3.2@-3.416,23.156 ccw(c-4.01,23.75) -3.17,23.75 ; C3.2@-3.416,23.156 ccw(c-4.01,23.75) -3.17,23.75 ; C3.2@-3.416,23.156 ccw(c-4.01,23.75) -3.17,23.75 ; -3.17,29.63 cw(c-0.452,29.63) L1.1@-2.374,31.552 ; -3.17,29.63 cw(c-0.452,29.63) L1.1@-2.374,31.552 ; -3.17,29.63 cw(c-0.452,29.63) L1.1@-2.374,31.552
NetC5_1: C5.1 C6.2 C10.1 C11.2 L1.2 L2.2 R1.2 SW.1 U3.5 | length 238.3
  Top Layer w0.3: v1(-44.526,31.471) -44.526,30.277 -42.926,28.677 -33.803,28.677 -32.648,29.832 U3.5@-32.648,31.906 -32.648,32.362 -32.06,32.95 -23.647,32.95 -22.289,34.308 L2.2@-22.289,36.474 ; v1@-44.632,31.365 cw(c-44.888,31.108) -44.526,31.108 ; v1@-44.632,31.365 cw(c-44.888,31.108) -44.526,31.108 ; v1@-44.632,31.365 cw(c-44.888,31.108) -44.526,31.108 ; -44.526,31.108 cw(c-44.164,31.108) v1@-44.42,31.365 ; -44.526,31.108 cw(c-44.164,31.108) v1@-44.42,31.365 ; -44.526,31.108 cw(c-44.164,31.108) v1@-44.42,31.365 ; L2.2@-22.705,34.895 cw(c-22.911,34.308) -22.289,34.308 ; L2.2@-22.705,34.895 cw(c-22.911,34.308) -22.289,34.308 ; L2.2@-22.705,34.895 cw(c-22.911,34.308) -22.289,34.308 ; -22.289,34.308 cw(c-21.667,34.308) L2.2@-21.873,34.895 ; -22.289,34.308 cw(c-21.667,34.308) L2.2@-21.873,34.895 ; -22.289,34.308 cw(c-21.667,34.308) L2.2@-21.873,34.895
  Top Layer w0.5: C10.1@-18.078,37.806 -17.664,38.22 C11.2@-14.188,38.22 ; C10.1@-17.272,37.7 cw(c-16.017,36.445) -16.017,38.22 ; C10.1@-17.272,37.7 cw(c-16.017,36.445) -16.017,38.22 ; C10.1@-17.272,37.7 cw(c-16.017,36.445) -16.017,38.22 ; C10.1@-16.919,37.347 cw(c-14.809,35.237) C11.2@-14.809,38.22 ; C10.1@-16.919,37.347 cw(c-14.809,35.237) C11.2@-14.809,38.22 ; C10.1@-16.919,37.347 cw(c-14.809,35.237) C11.2@-14.809,38.22 ; -15.253,38.22 cw(c-15.253,37.255) C11.2@-14.57,37.937 ; -15.253,38.22 ccw(c-15.253,39.186) C11.2@-14.57,38.503 ; -15.253,38.22 ccw(c-15.253,39.186) C11.2@-14.57,38.503 ; -15.253,38.22 cw(c-15.253,37.255) C11.2@-14.57,37.937 ; -15.253,38.22 ccw(c-15.253,39.186) C11.2@-14.57,38.503 ; -15.253,38.22 cw(c-15.253,37.255) C11.2@-14.57,37.937
  Top Layer w0.8: L2.2@-22.289,36.474 -20.42,34.605 ; C6.2@-20.04,29.65 C6.2@-20.04,30.17 ; L1.2@-12.27,31.15 -13.38,31.15 ; R1.2@-12.178,26.046 -12.178,29.504 ; L1.2@-11.499,33.031 -13.38,31.15 ; L1.2@-11.476,33.054 L1.2@-11.17,33.36 ; L1.2@-10.838,32.326 -10.838,30.844 -12.178,29.504 ; L2.2@-22.08,35.096 cw(c-21.702,33.324) -20.42,34.605 ; L2.2@-22.08,35.096 cw(c-21.702,33.324) -20.42,34.605 ; L2.2@-22.08,35.096 cw(c-21.702,33.324) -20.42,34.605 ; L2.2@-21.289,36.074 ccw(c-19.84,36.074) -20.865,35.05 ; L2.2@-21.289,36.074 ccw(c-19.84,36.074) -20.865,35.05 ; L2.2@-21.289,36.074 ccw(c-19.84,36.074) -20.865,35.05 ; -20.42,34.605 C6.2@-20.42,29.79 C6.2@-20.04,30.17 ; C6.2@-20.07,29.79 cw(c-19.225,29.79) C6.2@-19.823,30.387 ; C6.2@-20.07,29.79 cw(c-19.225,29.79) C6.2@-19.823,30.387 ; C6.2@-20.07,29.79 cw(c-19.225,29.79) C6.2@-19.823,30.387 ; C6.2@-20.04,30.17 -19.06,31.15 C5.1@-16.36,31.15 -13.38,31.15 ; -18.933,31.15 cw(c-18.933,28.977) C5.1@-17.396,30.514 ; -18.933,31.15 ccw(c-18.933,33.323) C5.1@-17.396,31.786 ; -18.933,31.15 ccw(c-18.933,33.323) C5.1@-17.396,31.786 ; -18.933,31.15 cw(c-18.933,28.977) C5.1@-17.396,30.514 ; -18.933,31.15 ccw(c-18.933,33.323) C5.1@-17.396,31.786 ; -18.933,31.15 cw(c-18.933,28.977) C5.1@-17.396,30.514 ; C5.1@-15.324,30.514 cw(c-13.787,28.977) -13.787,31.15 ; C5.1@-15.324,30.514 cw(c-13.787,28.977) -13.787,31.15 ; C5.1@-15.324,30.514 cw(c-13.787,28.977) -13.787,31.15 ; C5.1@-15.324,31.786 ccw(c-13.787,33.323) -13.787,31.15 ; C5.1@-15.324,31.786 ccw(c-13.787,33.323) -13.787,31.15 ; C5.1@-15.324,31.786 ccw(c-13.787,33.323) -13.787,31.15 ; -13.38,31.15 cw(c-12.343,30.113) L1.2@-11.551,31.347 ; -13.38,31.15 ccw(c-13.38,32.546) L1.2@-11.999,32.338 ; -13.38,31.15 ccw(c-13.38,32.546) L1.2@-11.999,32.338 ; -13.38,31.15 cw(c-12.343,30.113) L1.2@-11.551,31.347 ; -13.38,31.15 ccw(c-13.38,32.546) L1.2@-11.999,32.338 ; -13.38,31.15 cw(c-12.343,30.113) L1.2@-11.551,31.347 ; -12.678,31.852 cw(c-11.794,30.968) L1.2@-11.118,32.02 ; -12.678,31.852 cw(c-11.794,30.968) L1.2@-11.118,32.02 ; -12.678,31.852 cw(c-11.794,30.968) L1.2@-11.118,32.02 ; -12.45,31.15 ccw(c-12.45,32.406) L1.2@-11.208,32.218 ; -12.45,31.15 ccw(c-12.45,32.406) L1.2@-11.208,32.218 ; -12.45,31.15 ccw(c-12.45,32.406) L1.2@-11.208,32.218 ; -12.178,29.504 ccw(c-13.468,30.795) L1.2@-11.88,31.695 ; -12.178,29.504 ccw(c-13.468,30.795) L1.2@-11.88,31.695 ; -12.178,29.504 ccw(c-13.468,30.795) L1.2@-11.88,31.695 ; -11.434,30.247 ccw(c-12.52,31.333) L1.2@-11.184,32.09 ; -11.434,30.247 ccw(c-12.52,31.333) L1.2@-11.184,32.09 ; -11.434,30.247 ccw(c-12.52,31.333) L1.2@-11.184,32.09
  Top Layer w1: L2.2@-20.957,37.806 C10.1@-18.078,37.806 ; -12.27,26.76 L1.2@-12.27,31.15 ; L2.2@-22.362,36.943 cw(c-20.377,35.093) -20.377,37.806 ; L2.2@-22.362,36.943 cw(c-20.377,35.093) -20.377,37.806 ; L2.2@-22.362,36.943 cw(c-20.377,35.093) -20.377,37.806 ; L2.2@-21.631,36.261 cw(c-18.078,32.951) C10.1@-18.078,37.806 ; L2.2@-21.631,36.261 cw(c-18.078,32.951) C10.1@-18.078,37.806 ; L2.2@-21.631,36.261 cw(c-18.078,32.951) C10.1@-18.078,37.806 ; -19.744,37.806 cw(c-19.744,36.841) C10.1@-19.061,37.523 ; -19.744,37.806 ccw(c-19.744,38.772) C10.1@-19.061,38.089 ; -19.744,37.806 ccw(c-19.744,38.772) C10.1@-19.061,38.089 ; -19.744,37.806 cw(c-19.744,36.841) C10.1@-19.061,37.523 ; -19.744,37.806 ccw(c-19.744,38.772) C10.1@-19.061,38.089 ; -19.744,37.806 cw(c-19.744,36.841) C10.1@-19.061,37.523 ; -12.27,26.974 cw(c-5.797,26.974) L1.2@-10.374,31.552 ; -12.27,26.974 cw(c-5.797,26.974) L1.2@-10.374,31.552 ; -12.27,26.974 cw(c-5.797,26.974) L1.2@-10.374,31.552 ; -12.27,29.389 cw(c-8.211,29.389) L1.2@-11.081,32.259 ; -12.27,29.389 cw(c-8.211,29.389) L1.2@-11.081,32.259 ; -12.27,29.389 cw(c-8.211,29.389) L1.2@-11.081,32.259 ; -12.16,30.391 cw(c-10.534,29.453) L1.2@-10.856,31.302 ; -12.16,30.391 cw(c-10.534,29.453) L1.2@-10.856,31.302 ; -12.16,30.391 cw(c-10.534,29.453) L1.2@-10.856,31.302 ; -12.064,30.557 ccw(c-13.66,31.478) L1.2@-11.88,31.955 ; -12.064,30.557 ccw(c-13.66,31.478) L1.2@-11.88,31.955 ; -12.064,30.557 ccw(c-13.66,31.478) L1.2@-11.88,31.955
  Bottom Layer w0.3: SW.1@-48.387,43.917 -48.285,44.018 -47.041,44.018 ; v1(-44.526,31.471) -44.526,41.504 -47.041,44.018 ; SW.1@-48.141,43.745 cw(c-47.616,43.378) -47.616,44.018 ; SW.1@-48.141,43.745 cw(c-47.616,43.378) -47.616,44.018 ; SW.1@-48.141,43.745 cw(c-47.616,43.378) -47.616,44.018 ; SW.1@-47.963,44.341 ccw(c-47.184,45.12) -47.184,44.018 ; SW.1@-47.963,44.341 ccw(c-47.184,45.12) -47.184,44.018 ; SW.1@-47.963,44.341 ccw(c-47.184,45.12) -47.184,44.018 ; SW.1@-47.895,43.573 cw(c-47.041,42.976) -47.041,44.018 ; SW.1@-47.895,43.573 cw(c-47.041,42.976) -47.041,44.018 ; SW.1@-47.895,43.573 cw(c-47.041,42.976) -47.041,44.018 ; v1@-44.632,31.577 ccw(c-44.888,31.833) -44.526,31.833 ; v1@-44.632,31.577 ccw(c-44.888,31.833) -44.526,31.833 ; v1@-44.632,31.577 ccw(c-44.888,31.833) -44.526,31.833 ; -44.526,31.833 ccw(c-44.164,31.833) v1@-44.42,31.577 ; -44.526,31.833 ccw(c-44.164,31.833) v1@-44.42,31.577 ; -44.526,31.833 ccw(c-44.164,31.833) v1@-44.42,31.577
NetC19_2: C19.2 U4.4 U4.17 | length 31.5
  Top Layer w0.26: 1.499,26.746 U4.4@4.287,26.746
  Top Layer w0.3: 1.499,26.746 1.473,26.746 0.94,26.213 0.94,19.583 1.6,18.923 6.045,18.923 8.672,21.55 13.807,21.55 14.383,20.974 14.383,17.605 C19.2@14.243,17.464 ; C19.2@13.889,17.918 ccw(c12.697,19.11) 14.383,19.11 ; C19.2@14.101,17.706 ccw(c13.421,18.386) 14.383,18.386 ; 14.383,18.432 ccw(c15.111,18.432) C19.2@14.596,17.918
NetL2_1: L2.1 U3.9 | length 64.9
  Top Layer w0.26: U3.9@-34.148,36.181 -34.148,37.822
  Top Layer w0.3: -34.148,37.822 -33.81,38.16 ; L2.1@-30.05,36.45 -31.76,38.16 ; -33.81,38.16 cw(c-33.81,35.698) L2.1@-31.475,36.478 ; -33.81,38.16 cw(c-33.81,35.698) L2.1@-31.475,36.478 ; -33.81,38.16 cw(c-33.81,35.698) L2.1@-31.475,36.478 ; -33.81,38.16 -31.76,38.16 ; -33.393,38.16 cw(c-33.393,35.837) L2.1@-31.19,36.573 ; -33.393,38.16 cw(c-33.393,35.837) L2.1@-31.19,36.573 ; -33.393,38.16 cw(c-33.393,35.837) L2.1@-31.19,36.573 ; -32.977,38.16 cw(c-32.977,35.976) L2.1@-30.905,36.668 ; -32.977,38.16 cw(c-32.977,35.976) L2.1@-30.905,36.668 ; -32.977,38.16 cw(c-32.977,35.976) L2.1@-30.905,36.668 ; -32.56,38.16 cw(c-32.56,36.115) L2.1@-30.621,36.763 ; -32.56,38.16 cw(c-32.56,36.115) L2.1@-30.621,36.763 ; -32.56,38.16 cw(c-32.56,36.115) L2.1@-30.621,36.763 ; -32.144,38.16 cw(c-32.144,36.255) L2.1@-30.336,36.859 ; -32.144,38.16 cw(c-32.144,36.255) L2.1@-30.336,36.859 ; -32.144,38.16 cw(c-32.144,36.255) L2.1@-30.336,36.859 ; -31.76,38.16 cw(c-32.472,37.448) L2.1@-31.498,37.192 ; -31.76,38.16 ccw(c-31.183,38.737) L2.1@-30.83,38.001 ; -31.76,38.16 ccw(c-31.183,38.737) L2.1@-30.83,38.001 ; -31.76,38.16 cw(c-32.472,37.448) L2.1@-31.498,37.192 ; -31.76,38.16 ccw(c-31.183,38.737) L2.1@-30.83,38.001 ; -31.76,38.16 cw(c-32.472,37.448) L2.1@-31.498,37.192 ; -31.727,38.16 cw(c-31.727,36.394) L2.1@-30.052,36.954 ; -31.727,38.16 cw(c-31.727,36.394) L2.1@-30.052,36.954 ; -31.727,38.16 cw(c-31.727,36.394) L2.1@-30.052,36.954 ; L2.1@-31.461,37.861 ccw(c-30.989,38.332) L2.1@-30.7,37.731 ; L2.1@-31.461,37.861 ccw(c-30.989,38.332) L2.1@-30.7,37.731 ; L2.1@-31.461,37.861 ccw(c-30.989,38.332) L2.1@-30.7,37.731 ; L2.1@-31.39,37.79 cw(c-31.887,37.294) L2.1@-31.208,37.116 ; L2.1@-31.39,37.79 cw(c-31.887,37.294) L2.1@-31.208,37.116 ; L2.1@-31.39,37.79 cw(c-31.887,37.294) L2.1@-31.208,37.116
NetLED1_1: LED1.1 R11.2 | length 12.7
  Top Layer w0.5: R11.2@-12.18,70.93 -3.35,70.93 LED1.1@-3.02,71.26 ; R11.2@-11.718,70.718 cw(c-11.206,70.206) -11.206,70.93 ; R11.2@-11.718,70.718 cw(c-11.206,70.206) -11.206,70.93 ; R11.2@-11.718,70.718 cw(c-11.206,70.206) -11.206,70.93 ; R11.2@-11.718,71.142 ccw(c-11.206,71.654) -11.206,70.93 ; R11.2@-11.718,71.142 ccw(c-11.206,71.654) -11.206,70.93 ; R11.2@-11.718,71.142 ccw(c-11.206,71.654) -11.206,70.93
NetLED2_2: LED2.2 R12.2 | length 24.9
  Top Layer w0.5: R12.2@-11.98,67.95 R12.2@-12.21,67.72 -3.46,67.72 LED2.2@-3.02,67.28 ; R12.2@-11.748,67.508 cw(c-11.236,66.996) -11.236,67.72 ; R12.2@-11.748,67.508 cw(c-11.236,66.996) -11.236,67.72 ; R12.2@-11.748,67.508 cw(c-11.236,66.996) -11.236,67.72 ; R12.2@-11.748,67.932 ccw(c-11.236,68.444) -11.236,67.72 ; R12.2@-11.748,67.932 ccw(c-11.236,68.444) -11.236,67.72 ; R12.2@-11.748,67.932 ccw(c-11.236,68.444) -11.236,67.72 ; -5.269,67.72 cw(c-5.269,65.131) LED2.2@-3.438,66.962 ; -5.269,67.72 cw(c-5.269,65.131) LED2.2@-3.438,66.962 ; -5.269,67.72 cw(c-5.269,65.131) LED2.2@-3.438,66.962 ; -4.062,67.72 cw(c-4.062,66.338) LED2.2@-3.085,67.315 ; -4.062,67.72 cw(c-4.062,66.338) LED2.2@-3.085,67.315 ; -4.062,67.72 cw(c-4.062,66.338) LED2.2@-3.085,67.315 ; -3.728,67.687 cw(c-3.895,67.398) LED2.2@-3.565,67.348 ; -3.728,67.687 ccw(c-3.521,68.046) LED2.2@-3.329,67.679 ; -3.728,67.687 ccw(c-3.521,68.046) LED2.2@-3.329,67.679 ; -3.728,67.687 cw(c-3.895,67.398) LED2.2@-3.565,67.348 ; -3.728,67.687 ccw(c-3.521,68.046) LED2.2@-3.329,67.679 ; -3.728,67.687 cw(c-3.895,67.398) LED2.2@-3.565,67.348
NetR1_1: R1.1 R2.1 U2.4 | length 16.1
  Top Layer w0.5: R2.1@-13.17,20.61 -13.17,23.136 R1.1@-12.27,24.036 ; R1.1@-12.052,24.172 -10.954,23.074 U2.4@-10.954,21.81 ; R2.1@-13.382,20.822 ccw(c-13.894,21.334) -13.17,21.334 ; R2.1@-13.382,20.822 ccw(c-13.894,21.334) -13.17,21.334 ; R2.1@-13.382,20.822 ccw(c-13.894,21.334) -13.17,21.334 ; -13.17,21.334 ccw(c-12.446,21.334) R2.1@-12.958,20.822 ; -13.17,21.334 ccw(c-12.446,21.334) R2.1@-12.958,20.822 ; -13.17,21.334 ccw(c-12.446,21.334) R2.1@-12.958,20.822 ; -13.058,23.247 ccw(c-13.857,24.046) R1.1@-12.728,24.046 ; -13.058,23.247 ccw(c-13.857,24.046) R1.1@-12.728,24.046 ; -13.058,23.247 ccw(c-13.857,24.046) R1.1@-12.728,24.046 ; R1.1@-11.928,23.746 cw(c-11.928,23.017) R1.1@-11.412,23.532 ; R1.1@-11.928,23.746 cw(c-11.928,23.017) R1.1@-11.412,23.532 ; R1.1@-11.928,23.746 cw(c-11.928,23.017) R1.1@-11.412,23.532 ; R1.1@-11.628,24.046 ccw(c-10.908,24.046) R1.1@-11.417,23.537 ; R1.1@-11.628,24.046 ccw(c-10.908,24.046) R1.1@-11.417,23.537 ; R1.1@-11.628,24.046 ccw(c-10.908,24.046) R1.1@-11.417,23.537
NetR9_1: R9.1 VT1.1 | length 12.4
  Top Layer w0.3: 9.11,34.698 ccw(c10.535,34.698) R9.1@9.527,33.691 ; 9.11,35.423 ccw(c11.259,35.423) R9.1@9.74,33.903 ; VT1.1@9.11,36.91 9.11,34.217 ; R9.1@9.707,33.62 9.11,34.217 ; VT1.1@8.863,36.513 cw(c8.265,35.915) 9.11,35.915 ; VT1.1@8.863,36.513 cw(c8.265,35.915) 9.11,35.915 ; VT1.1@8.863,36.513 cw(c8.265,35.915) 9.11,35.915 ; 9.11,34.217 cw(c8.916,34.023) R9.1@9.136,33.859 ; 9.11,34.217 cw(c8.916,34.023) R9.1@9.136,33.859 ; 9.11,34.217 cw(c8.916,34.023) R9.1@9.136,33.859 ; 9.11,35.915 cw(c9.955,35.915) VT1.1@9.357,36.513 ; 9.11,35.915 cw(c9.955,35.915) VT1.1@9.357,36.513 ; 9.11,35.915 cw(c9.955,35.915) VT1.1@9.357,36.513 ; R9.1@9.201,34.126 ccw(c9.457,34.382) R9.1@9.457,34.02 ; R9.1@9.201,34.126 ccw(c9.457,34.382) R9.1@9.457,34.02 ; R9.1@9.201,34.126 ccw(c9.457,34.382) R9.1@9.457,34.02
NetR10_1: R10.1 VT2.1 | length 11.9
  Top Layer w0.3: R10.1@12.85,33.62 13.13,33.9 VT2.1@13.13,36.89 ; R10.1@12.817,33.903 ccw(c12.062,34.658) 13.13,34.658 ; R10.1@12.817,33.903 ccw(c12.062,34.658) 13.13,34.658 ; R10.1@12.817,33.903 ccw(c12.062,34.658) 13.13,34.658 ; VT2.1@12.883,36.493 cw(c12.285,35.895) 13.13,35.895 ; VT2.1@12.883,36.493 cw(c12.285,35.895) 13.13,35.895 ; VT2.1@12.883,36.493 cw(c12.285,35.895) 13.13,35.895 ; 13.13,34.513 ccw(c13.993,34.513) R10.1@13.383,33.903 ; 13.13,34.513 ccw(c13.993,34.513) R10.1@13.383,33.903 ; 13.13,34.513 ccw(c13.993,34.513) R10.1@13.383,33.903 ; 13.13,35.895 cw(c13.975,35.895) VT2.1@13.377,36.493 ; 13.13,35.895 cw(c13.975,35.895) VT2.1@13.377,36.493 ; 13.13,35.895 cw(c13.975,35.895) VT2.1@13.377,36.493
PA1: LED1.2 U1.11 | length 86.9
  Top Layer w0.3: U1.11@-38.9,54.98 -38.59,54.67 ; U1.11@-38.28,54.98 -38.59,54.67 ; LED1.2@-3.02,73.8 -1.72,73.8 ; U1.11@-38.995,54.939 cw(c-39.974,53.96) -38.59,53.96 ; U1.11@-38.995,54.939 cw(c-39.974,53.96) -38.59,53.96 ; U1.11@-38.995,54.939 cw(c-39.974,53.96) -38.59,53.96 ; U1.11@-38.864,54.88 cw(c-38.878,54.592) -38.59,54.592 ; U1.11@-38.864,54.88 cw(c-38.878,54.592) -38.59,54.592 ; U1.11@-38.864,54.88 cw(c-38.878,54.592) -38.59,54.592 ; U1.11@-38.783,55.151 cw(c-39.25,54.684) -38.59,54.684 ; U1.11@-38.783,55.151 cw(c-39.25,54.684) -38.59,54.684 ; U1.11@-38.783,55.151 cw(c-39.25,54.684) -38.59,54.684 ; -38.693,54.415 cw(c-38.221,54.687) U1.11@-38.684,54.975 ; -38.693,54.415 cw(c-38.221,54.687) U1.11@-38.684,54.975 ; -38.693,54.415 cw(c-38.221,54.687) U1.11@-38.684,54.975 ; U1.11@-38.666,55.012 ccw(c-38.359,54.901) -38.59,54.67 ; U1.11@-38.666,55.012 ccw(c-38.359,54.901) -38.59,54.67 ; U1.11@-38.666,55.012 ccw(c-38.359,54.901) -38.59,54.67 ; -38.59,54.67 -38.59,48.115 -36.449,45.974 -14.706,45.974 -11.89,48.79 -6.325,48.79 -5.638,49.476 -2.304,49.476 -1,50.78 -1,73.08 -1.72,73.8 ; LED1.2@-2.503,73.441 cw(c-1.72,72.766) -1.72,73.8 ; LED1.2@-2.503,73.441 cw(c-1.72,72.766) -1.72,73.8 ; LED1.2@-2.503,73.441 cw(c-1.72,72.766) -1.72,73.8 ; LED1.2@-2.503,74.159 ccw(c-1.72,74.834) -1.72,73.8 ; LED1.2@-2.503,74.159 ccw(c-1.72,74.834) -1.72,73.8 ; LED1.2@-2.503,74.159 ccw(c-1.72,74.834) -1.72,73.8
RESET: CN5.3 U1.25 | length 48
  Top Layer w0.5: U1.25@-16.003,58.89 v1@-13.246,58.89
  Bottom Layer w0.3: CN5.3@-48.362,59.614 -46.203,59.614 -37.338,50.749 -16.383,50.749 -14.072,53.061 -14.072,58.471 -13.677,58.865 v1(-13.28,58.865)